# EAGLE board PCB v21 (EAGLE 9.7.0)
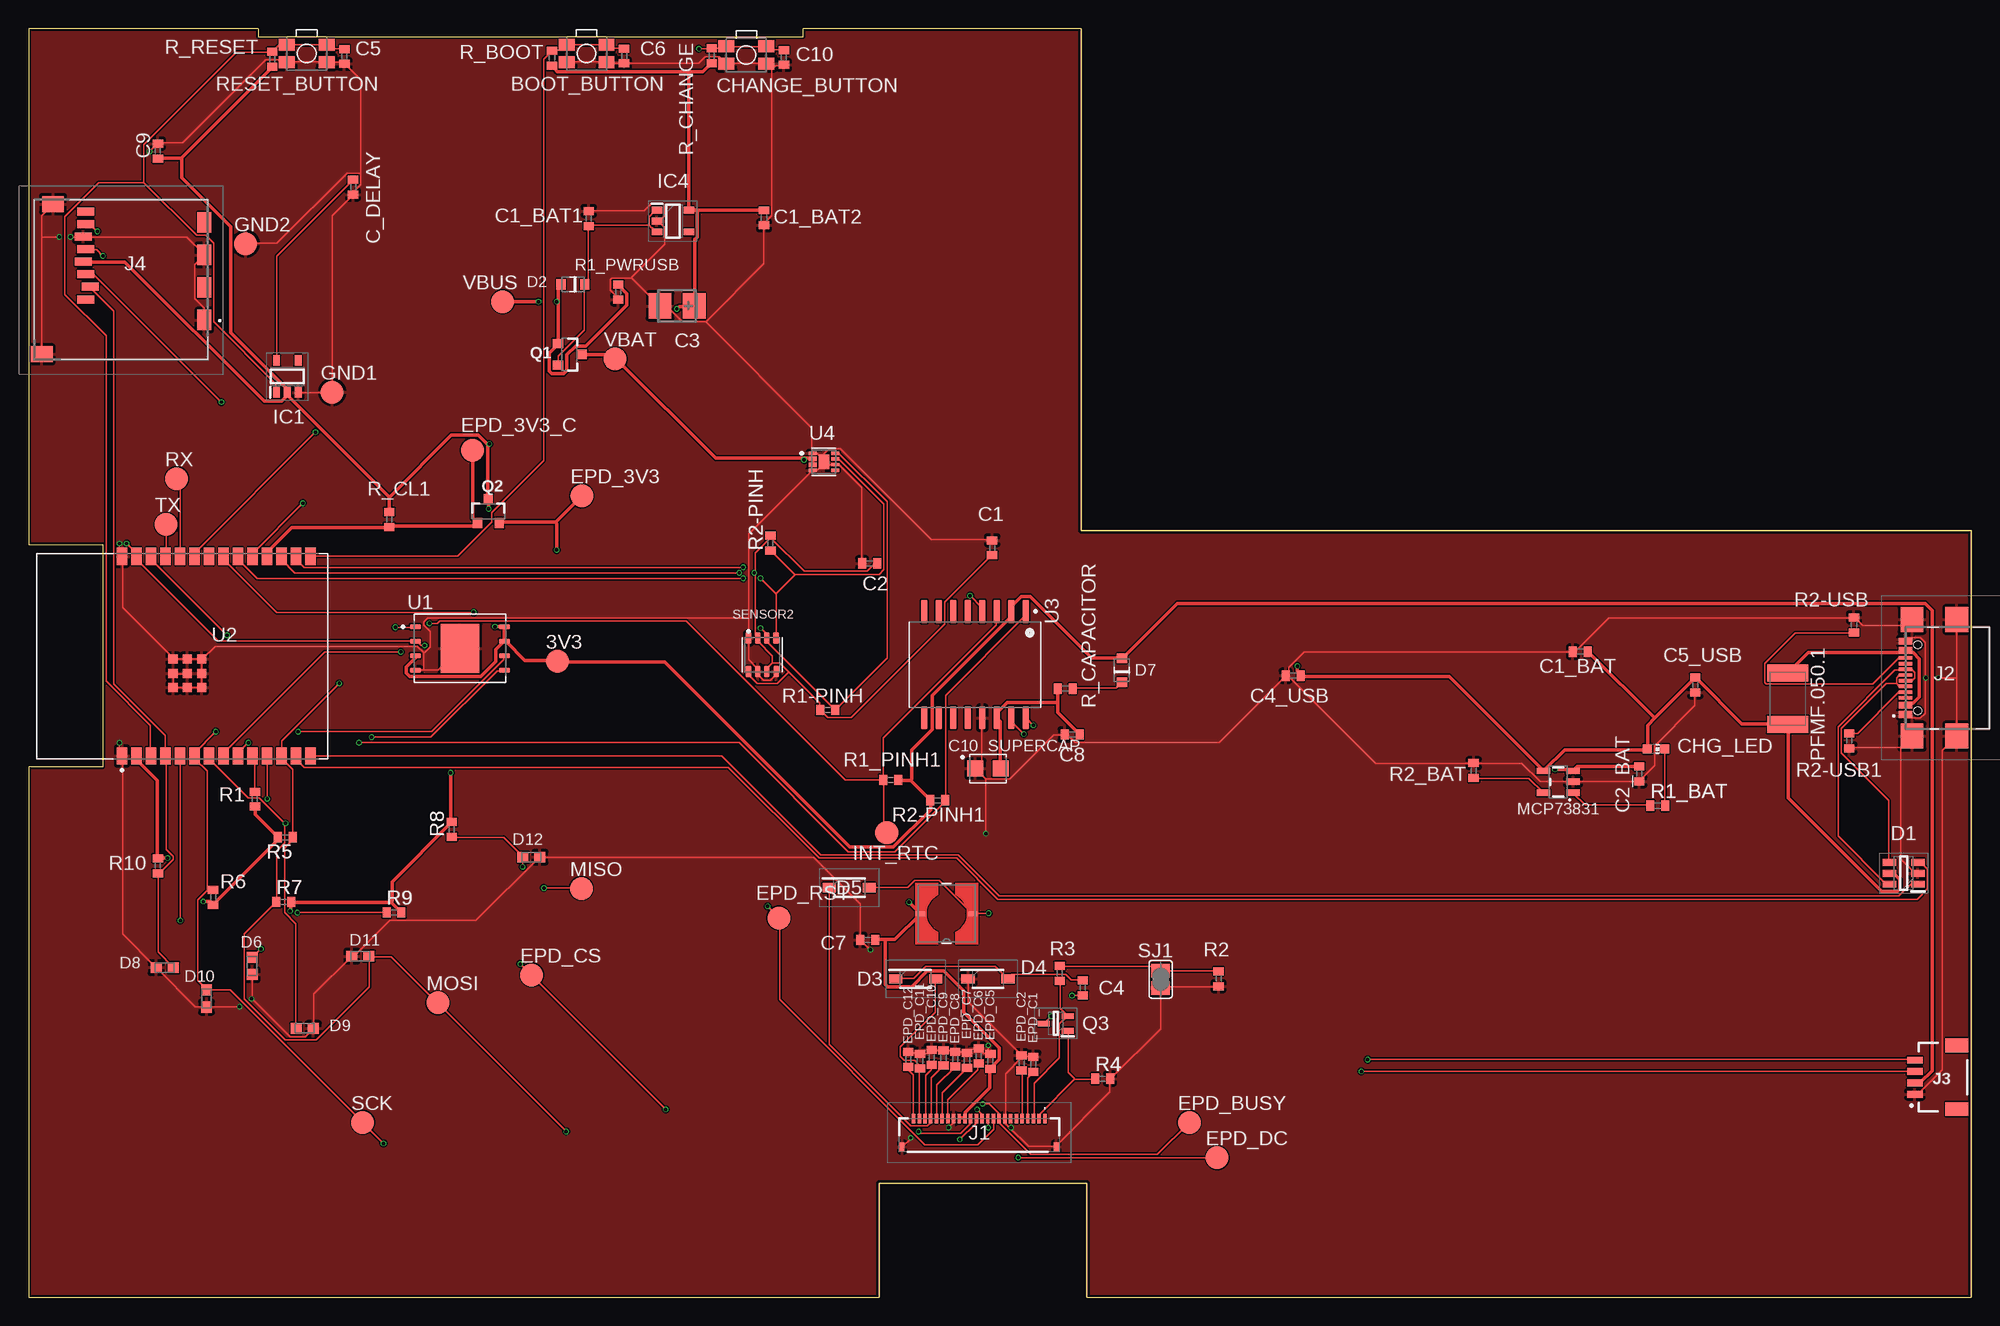
[diagram p0: board, top side]
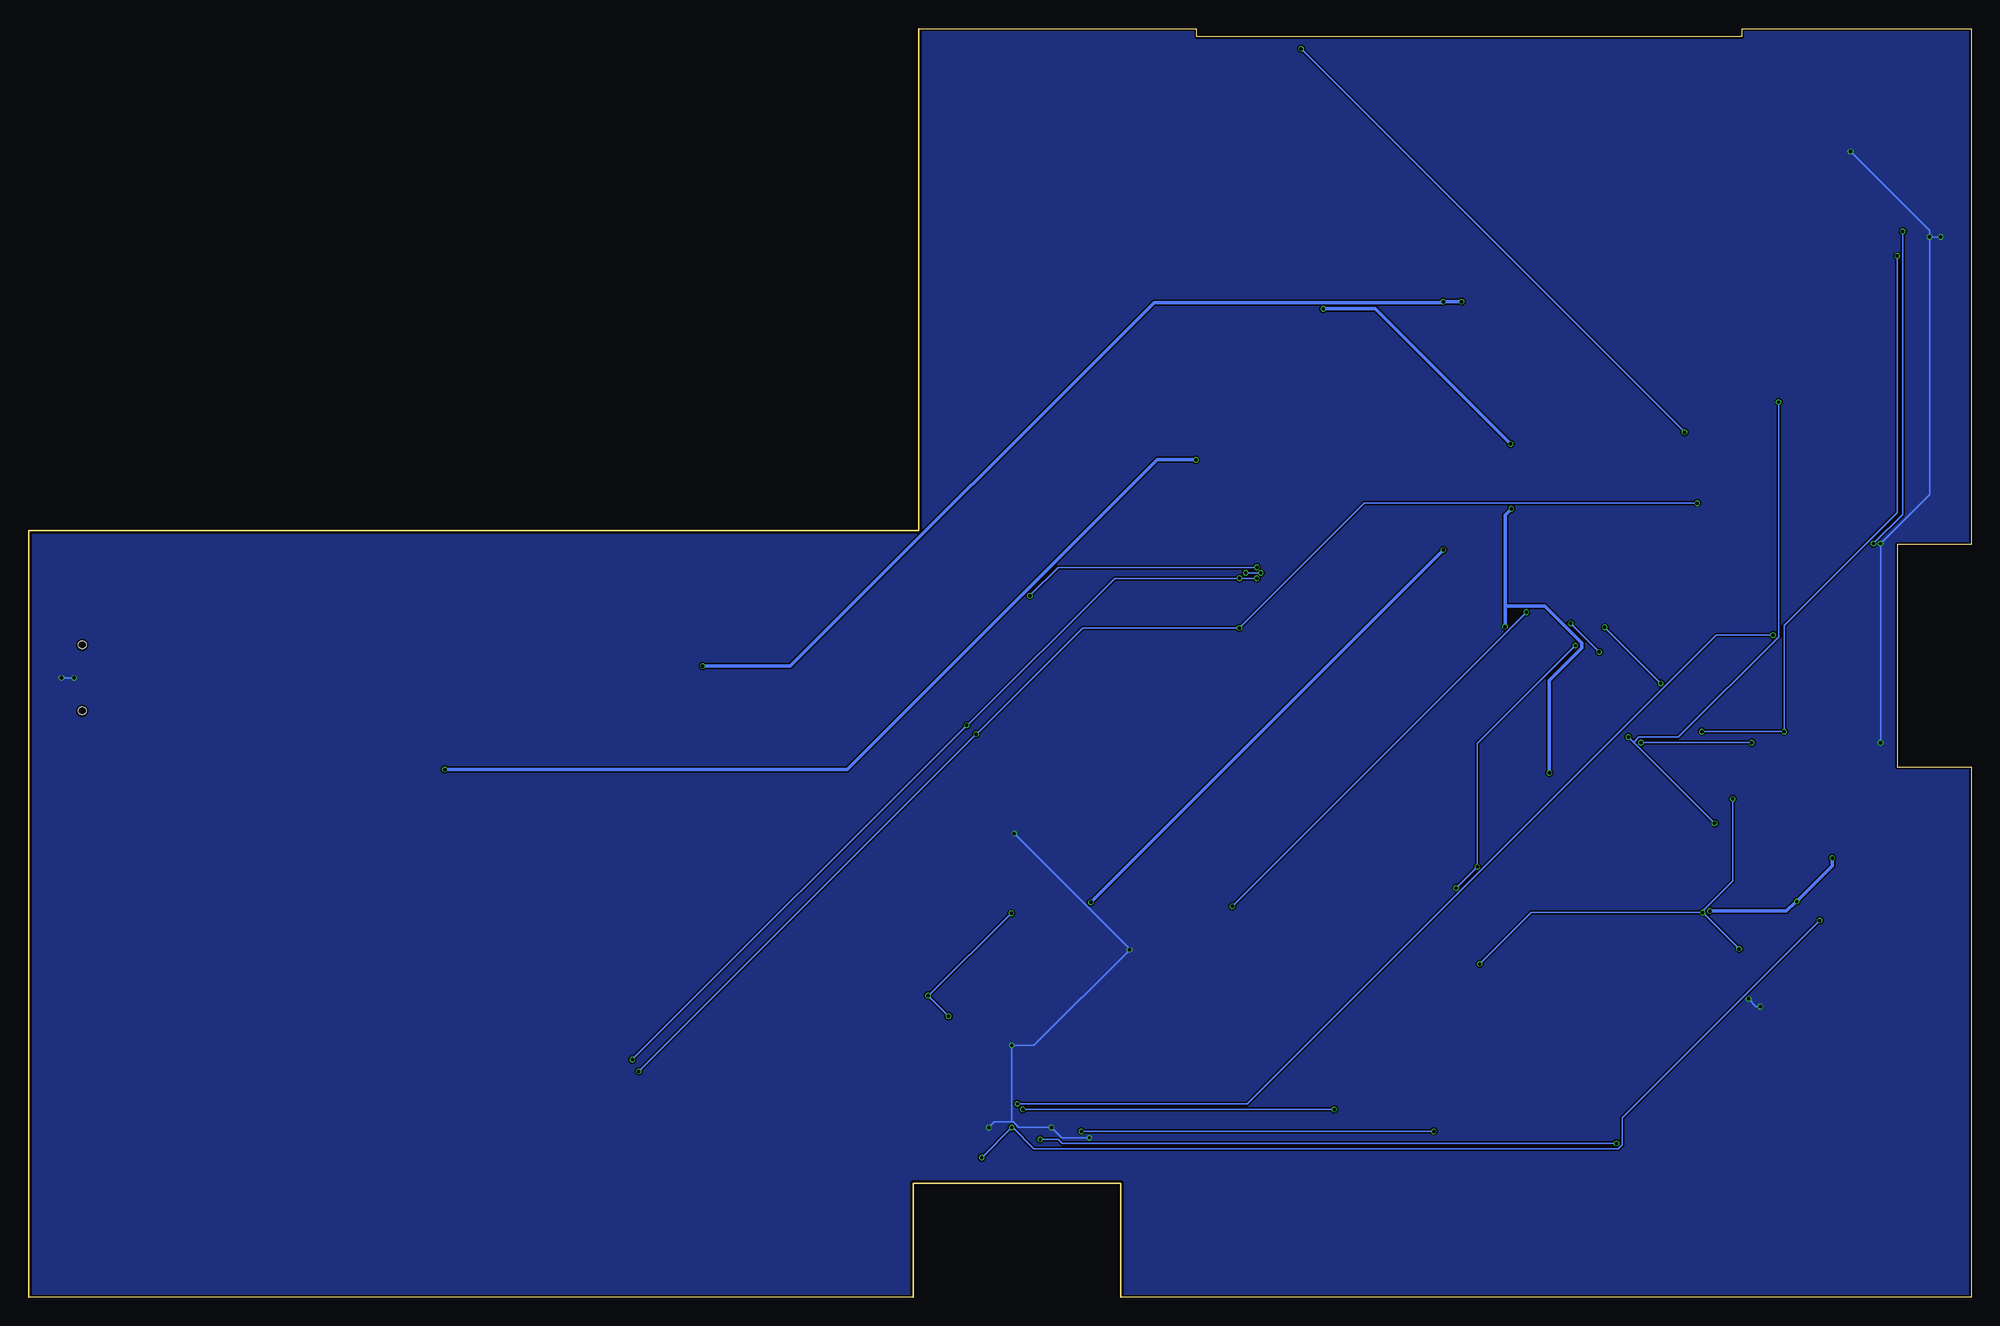
[diagram p1: board, bottom side, seen from below]

Size 170.2 x 111.2 mm. Coordinates in mm from the lower left corner, seen from the top.
Outline: 0,0 74.51,0 74.51,10 92.71,10 92.71,0 170.2,0 170.2,67.2 92.2,67.2 92.2,111.2 67.85,111.2 67.85,110.49 20.13,110.49 20.13,111.2 0,111.2 0,66 6.5,66 6.5,46.5 0,46.5 0,0
Copper layers (1*16): Top 0.035mm / dielectric 1.6mm / Bottom 0.035mm
Design rules "jlcpcb-2layers.dru": minimum track width 0.15mm, minimum drill 0.3mm, track to track 5mil, track to pad 5mil, pad to pad 5mil, via to via 5mil, smd to smd 5mil, copper to edge 0.2mm, drill to drill 6mil, minimum pad ring 10mil, minimum via ring 3mil, stop-mask expansion 4mil, vias tented up to drill 0mil, thermal gap 10mil
Net classes: 1 trasee putere: width 0.3 mm

## Footprints (pad centres in the part's own frame; a part is rotated, then mirrored left to right if it is on the bottom)
TP20R = smd 2 x 2: TP 0,0
MYBUTTON = smd 1.4 x 1.05: 1 1.75,0.75; 2 -1.75,0.75; 3 -1.75,-0.75; 4 1.75,-0.75
ESP32_WROVER_EAGLE-LTSPICE_C0402 = smd 0.7 x 0.9: 1 -0.65,0; 2 0.65,0
RCL_CT3528 = smd 2 x 2.2: + -1.5,0; - 1.5,0
CAPCP3225X100N = smd 1.4 x 1.4: 1 -1.1,0; 2 1.1,0
ADAFRUIT_CHIP-LED0603 = smd 0.8 x 0.8: A 0,-0.75; C 0,0.75
SOT95P280X145-6N = smd 1.2 x 0.6: 1 -1.25,0.95; 2 -1.25,0; 3 -1.25,-0.95; 4 1.25,-0.95; 5 1.25,0; 6 1.25,0.95
ESP32_WROVER_AVX---SD0805S020S1R0_AVX_SD0805S020S1R0_0 = smd 0.8 x 0.9: 1 -1.05,0; 2 1.05,0
SOD3716X135N = smd 1.15 x 0.8: 1 -1.75,0; 2 1.75,0
DIOC1608X36N = smd 0.97 x 0.94: 1 -0.75,0; 2 0.75,0
SOT95P280X120-5N = smd 0.9 x 0.6: 1 -1.4,0.95; 2 -1.4,0; 3 -1.4,-0.95; 4 1.4,-0.95; 5 1.4,0.95
FH34SRJ24S05SH99 = smd 0.3 x 0.8: 1 5.75,1.45; 2 5.25,1.45; 3 4.75,1.45; 4 4.25,1.45; 5 3.75,1.45; 6 3.25,1.45; 7 2.75,1.45; 8 2.25,1.45; 9 1.75,1.45; 10 1.25,1.45; 11 0.75,1.45; 12 0.25,1.45; 13 -0.25,1.45; 14 -0.75,1.45; 15 -1.25,1.45; 16 -1.75,1.45; 17 -2.25,1.45; 18 -2.75,1.45; 19 -3.25,1.45; 20 -3.75,1.45; 21 -4.25,1.45; 22 -4.75,1.45; 23 -5.25,1.45; 24 -5.75,1.45 | smd 0.4 x 0.8: MP1 6.75,-1.05; MP2 -6.75,-1.05
SAMACSYS_PARTS_USB4110GFA = smd 0.3 x 1.15: A1 -3.35,3.678; A4 -2.55,3.678; A5 -1.25,3.678; A6 -0.25,3.678; A7 0.25,3.678; A8 1.25,3.678; A9 2.55,3.678; A12 3.35,3.678; B1 3.05,3.678; B4 2.25,3.678; B5 1.75,3.678; B6 0.75,3.678; B7 -0.75,3.678; B8 -1.75,3.678; B9 -2.25,3.678; B12 -3.05,3.678 | smd 2.18 x 2: MP1 -5.11,-0.827; MP2 5.11,-0.827; MP3 -5.11,3.103; MP4 5.11,3.103 | hole 0.65: -2.89,2.603; 2.89,2.603
JST04_1MM_RA = smd 0.6 x 1.35: 1 -1.5,0; 2 -0.5,0; 3 0.5,0; 4 1.5,0 | smd 1.2 x 2: NC1 2.8,-3.675; NC2 -2.8,-3.675
112ATAARR03ATTEND = smd 1.8 x 1.2: G1 10.6,10.4; G2 4.9,10.4; S1 7.75,10.4; S2 2.05,10.4 | smd 1.4 x 1.9: G3 13.6,-3.85; G4 0.45,-2.85 | smd 0.7 x 1.5: P1 8.8,0; P2 7.7,0.4; P3 6.6,0; P4 5.5,-0.2; P5 4.4,0; P6 3.3,-0.2; P7 2.2,0; P8 1.1,0
IND_4828-WE-TPC_WRE = smd 0.813 x 0.406: 1 -2.286,0; 2 2.286,0
ESP32_WROVER_SPARKFUN-IC-POWER_SOT23-5 = smd 0.55 x 1.2: 1 -0.95,-1.3; 2 0,-1.3; 3 0.95,-1.3; 4 0.95,1.3; 5 -0.95,1.3
ESP32C6_VARISTOR_CT/CN1812 = smd 1.5 x 3.6: 1 -2.25,0; 2 2.25,0
ESP32_WROVER_SPARKFUN-DISCRETESEMI_SOT23-3 = smd 0.8 x 0.9: 1 -0.95,-1; 2 0.95,-1; 3 0,1.1
SOT65P210X110-3N = smd 1.05 x 0.5: 1 -1.05,0.65; 2 -1.05,-0.65; 3 1.05,0
ESP32_WROVER_EAGLE-LTSPICE_R0402 = smd 0.7 x 0.9: 1 -0.65,0; 2 0.65,0
ESP32_WROVER_BME680_PSON80P300X300X100-8N = smd 1.016 x 0.5: 1 1.458,1.2; 2 1.458,0.4; 3 1.458,-0.4; 4 1.458,-1.2; 5 -1.458,-1.22; 6 -1.458,-0.4; 7 -1.458,0.4; 8 -1.458,1.2
SJ = smd 1.168 x 1.6: 1 -0.762,0; 2 0.762,0
SON127P600X800X80-9N = smd 0.94 x 0.44: 1 -3.895,1.905; 2 -3.895,0.635; 3 -3.895,-0.635; 4 -3.895,-1.905; 5 3.895,-1.905; 6 3.895,-0.635; 7 3.895,0.635; 8 3.895,1.905 | smd 3.4 x 4.3: 9 0,0
XCVR_ESP32-C6-WROOM-1-N8 = smd 1.5 x 0.9: 1 -8.75,5.26; 2 -8.75,3.99; 3 -8.75,2.72; 4 -8.75,1.45; 5 -8.75,0.18; 6 -8.75,-1.09; 7 -8.75,-2.36; 8 -8.75,-3.63; 9 -8.75,-4.9; 10 -8.75,-6.17; 11 -8.75,-7.44; 12 -8.75,-8.71; 13 -8.75,-9.98; 14 -8.75,-11.25; 15 8.75,-11.25; 16 8.75,-9.98; 17 8.75,-8.71; 18 8.75,-7.44; 19 8.75,-6.17; 20 8.75,-4.9; 21 8.75,-3.63; 22 8.75,-2.36; 23 8.75,-1.09; 24 8.75,0.18; 25 8.75,1.45; 26 8.75,2.72; 27 8.75,3.99; 28 8.75,5.26 | smd 0.8 x 0.8: 29_1 -2.755,0.79; 29_2 -1.505,0.79; 29_3 -0.255,0.79; 29_4 -2.755,-0.46; 29_5 -1.505,-0.46; 29_6 -0.255,-0.46; 29_7 -2.755,-1.71; 29_8 -1.505,-1.71; 29_9 -0.255,-1.71
SOIC127P1032X265-16N = smd 2.05 x 0.59: 1 -4.655,4.445; 2 -4.655,3.175; 3 -4.655,1.905; 4 -4.655,0.635; 5 -4.655,-0.635; 6 -4.655,-1.905; 7 -4.655,-3.175; 8 -4.655,-4.445; 9 4.655,-4.445; 10 4.655,-3.175; 11 4.655,-1.905; 12 4.655,-0.635; 13 4.655,0.635; 14 4.655,1.905; 15 4.655,3.175; 16 4.655,4.445
SON50P200X200X80-9N = smd 0.76 x 0.27: 1 -0.985,0.75; 4 -0.985,-0.75; 5 0.985,-0.75; 6 0.985,-0.25; 7 0.985,0.25; 8 0.985,0.75 | smd 0.813 x 0.406: 2 -0.985,0.25; 3 -0.985,-0.25 | smd 0.9 x 1.3: 9 0,0

## Placement (x,y rotation side)
3V3  TPTP20R  [TP20R]  46.33,55.75 0 top
BOOT_BUTTON  BUTTON_CUSYOMV1  [MYBUTTON]  48.88,109.02 180 top
C1  100nF  [ESP32_WROVER_EAGLE-LTSPICE_C0402]  84.41,65.7 90 top
C1_BAT  4.7uF  [ESP32_WROVER_EAGLE-LTSPICE_C0402]  135.94,56.59 180 top
C1_BAT1  4.7uF  [ESP32_WROVER_EAGLE-LTSPICE_C0402]  49.07,94.55 90 top
C1_BAT2  4.7uF  [ESP32_WROVER_EAGLE-LTSPICE_C0402]  64.43,94.61 270 top
C2  100nF  [ESP32_WROVER_EAGLE-LTSPICE_C0402]  73.68,64.33 180 top
C2_BAT  4.7uF  [ESP32_WROVER_EAGLE-LTSPICE_C0402]  141.09,45.89 270 top
C3  100uF  [RCL_CT3528]  56.81,86.89 180 top
C4  4.7uF/25V  [ESP32_WROVER_EAGLE-LTSPICE_C0402]  92.35,27.14 270 top
C4_USB  100nF  [ESP32_WROVER_EAGLE-LTSPICE_C0402]  110.78,54.49 180 top
C5  1uF  [ESP32_WROVER_EAGLE-LTSPICE_C0402]  27.67,108.75 270 top
C5_USB  4.7uF  [ESP32_WROVER_EAGLE-LTSPICE_C0402]  146.01,53.67 270 top
C6  100nF  [ESP32_WROVER_EAGLE-LTSPICE_C0402]  52.17,108.8 270 top
C7  10uF  [ESP32_WROVER_EAGLE-LTSPICE_C0402]  73.51,31.33 180 top
C8  100nF  [ESP32_WROVER_EAGLE-LTSPICE_C0402]  91.42,49.33 180 top
C9  100nF  [ESP32_WROVER_EAGLE-LTSPICE_C0402]  11.33,100.46 90 top
C10  100nF  [ESP32_WROVER_EAGLE-LTSPICE_C0402]  66.17,108.66 270 top
C10_SUPERCAP  CPH3225A  [CAPCP3225X100N]  84.05,46.35 0 top
C_DELAY  100nF  [ESP32_WROVER_EAGLE-LTSPICE_C0402]  28.43,97.31 270 top
CHANGE_BUTTON  BUTTON_CUSYOMV1  [MYBUTTON]  62.89,108.89 180 top
CHG_LED  [ADAFRUIT_CHIP-LED0603]  142.56,48.06 270 top
D1  USBLC6-2SC6Y  [SOT95P280X145-6N]  164.26,37.17 180 top
D2  ESP32_WROVER_AVX---SD0805S020S1R0_AVX_SD0805S020S1R0_0_0AVX_SD0805S020S1R0_0_0  [ESP32_WROVER_AVX---SD0805S020S1R0_AVX_SD0805S020S1R0_0]  47.69,88.78 180 top
D3  MBR0530  [SOD3716X135N]  77.71,27.91 0 top
D4  MBR0530  [SOD3716X135N]  84.05,27.91 0 top
D5  MBR0530  [SOD3716X135N]  71.89,35.91 0 top
D6  PGB1010603MR  [DIOC1608X36N]  19.59,29.05 90 top
D7  SD0805S020S1R0  [ESP32_WROVER_AVX---SD0805S020S1R0_AVX_SD0805S020S1R0_0]  95.78,54.96 90 top
D8  PGB1010603MR  [DIOC1608X36N]  11.93,28.91 0 top
D9  PGB1010603MR  [DIOC1608X36N]  24.19,23.59 180 top
D10  PGB1010603MR  [DIOC1608X36N]  15.59,26.19 90 top
D11  PGB1010603MR  [DIOC1608X36N]  29.07,29.91 0 top
D12  PGB1010603MR  [DIOC1608X36N]  44.05,38.59 180 top
EPD_3V3  TPTP20R  [TP20R]  48.48,70.25 0 top
EPD_3V3_C  TPTP20R  [TP20R]  38.88,74.25 0 top
EPD_BUSY  TPTP20R  [TP20R]  101.69,15.33 0 top
EPD_C1  1uF/50V  [ESP32_WROVER_EAGLE-LTSPICE_C0402]  88.02,20.44 90 top
EPD_C2  1uF/50V  [ESP32_WROVER_EAGLE-LTSPICE_C0402]  86.99,20.55 90 top
EPD_C5  0.1uF/50V  [ESP32_WROVER_EAGLE-LTSPICE_C0402]  84.26,20.7 90 top
EPD_C6  1uF/50V  [ESP32_WROVER_EAGLE-LTSPICE_C0402]  83.23,21.16 90 top
EPD_C7  1uF/50V  [ESP32_WROVER_EAGLE-LTSPICE_C0402]  82.2,20.78 90 top
EPD_C8  1uF/50V  [ESP32_WROVER_EAGLE-LTSPICE_C0402]  81.18,20.89 90 top
EPD_C9  1uF/50V  [ESP32_WROVER_EAGLE-LTSPICE_C0402]  80.15,21 90 top
EPD_C10  1uF/50V  [ESP32_WROVER_EAGLE-LTSPICE_C0402]  79.12,21.03 90 top
EPD_C11  1uF/50V  [ESP32_WROVER_EAGLE-LTSPICE_C0402]  78.1,20.71 90 top
EPD_C12  1uF/50V  [ESP32_WROVER_EAGLE-LTSPICE_C0402]  77.07,20.87 90 top
EPD_CS  TPTP20R  [TP20R]  44.08,28.25 0 top
EPD_DC  TPTP20R  [TP20R]  104.13,12.25 0 top
EPD_RST  TPTP20R  [TP20R]  65.73,33.25 0 top
GND1  TPTP20R  [TP20R]  26.59,79.33 0 top
GND2  TPTP20R  [TP20R]  19.01,92.33 0 top
IC1  BD5229G-TR  [SOT95P280X120-5N]  22.67,80.71 90 top
IC4  XC6220A331MR-G  [SOT95P280X120-5N]  56.45,94.33 0 top
INT_RTC  TPTP20R  [TP20R]  75.18,40.75 0 top
J1  FH34SRJ-24S-0.5SH_99_  [FH34SRJ24S05SH99]  83.28,14.23 0 top
J2  SAMACSYS_PARTS_USB4110-GF-A  [SAMACSYS_PARTS_USB4110GFA]  168.1,54.3 90 top
J3  QWIIC_RIGHT_ANGLE  [JST04_1MM_RA]  165.25,19.3 90 top
J4  112A-TAAR-R03_ATTEND  [112ATAARR03ATTEND]  5,96.26 270 top
L1  68uH  [IND_4828-WE-TPC_WRE]  80.43,33.64 180 top
MCP73831  ESP32_WROVER_SPARKFUN-IC-POWER_MCP73831  [ESP32_WROVER_SPARKFUN-IC-POWER_SOT23-5]  134,45.19 90 top
MISO  TPTP20R  [TP20R]  48.43,35.83 0 top
MOSI  TPTP20R  [TP20R]  35.85,25.83 0 top
PFMF.050.1  ESP32C6_VARISTORCN1812  [ESP32C6_VARISTOR_CT/CN1812]  154.11,52.46 270 top
Q1  20V/4.2A/52mΩ/1.4W  [ESP32_WROVER_SPARKFUN-DISCRETESEMI_SOT23-3]  47.37,82.64 270 top
Q2  20V/4.2A/52mΩ/1.4W  [ESP32_WROVER_SPARKFUN-DISCRETESEMI_SOT23-3]  40.28,68.87 0 top
Q3  SI1308EDL-T1-GE3  [SOT65P210X110-3N]  89.99,24.01 180 top
R1  10k  [ESP32_WROVER_EAGLE-LTSPICE_R0402]  19.83,43.67 90 top
R1-PINH  10k  [ESP32_WROVER_EAGLE-LTSPICE_R0402]  70,51.49 180 top
R1_BAT  200  [ESP32_WROVER_EAGLE-LTSPICE_R0402]  142.72,43.09 0 top
R1_PINH1  10k  [ESP32_WROVER_EAGLE-LTSPICE_R0402]  75.52,45.35 0 top
R1_PWRUSB  100k  [ESP32_WROVER_EAGLE-LTSPICE_R0402]  51.65,88.11 90 top
R2  2.2  [ESP32_WROVER_EAGLE-LTSPICE_R0402]  104.25,27.93 90 top
R2-PINH  10k  [ESP32_WROVER_EAGLE-LTSPICE_R0402]  64.99,66.11 90 top
R2-PINH1  10k  [ESP32_WROVER_EAGLE-LTSPICE_R0402]  79.65,43.57 180 top
R2-USB  5k1  [ESP32_WROVER_EAGLE-LTSPICE_R0402]  159.91,58.94 90 top
R2-USB1  5k1  [ESP32_WROVER_EAGLE-LTSPICE_R0402]  159.49,48.78 90 top
R2_BAT  2K  [ESP32_WROVER_EAGLE-LTSPICE_R0402]  126.59,46.17 270 top
R3  0.47  [ESP32_WROVER_EAGLE-LTSPICE_R0402]  90.33,28.41 90 top
R4  10k  [ESP32_WROVER_EAGLE-LTSPICE_R0402]  94.09,19.17 0 top
R5  10k  [ESP32_WROVER_EAGLE-LTSPICE_R0402]  22.49,40.33 180 top
R6  10k  [ESP32_WROVER_EAGLE-LTSPICE_R0402]  16.17,35.07 270 top
R7  10k  [ESP32_WROVER_EAGLE-LTSPICE_R0402]  22.35,34.67 0 top
R8  10k  [ESP32_WROVER_EAGLE-LTSPICE_R0402]  37.07,41.02 90 top
R9  10k  [ESP32_WROVER_EAGLE-LTSPICE_R0402]  32.01,33.75 0 top
R10  10k  [ESP32_WROVER_EAGLE-LTSPICE_R0402]  11.33,37.83 90 top
R_BOOT  10k  [ESP32_WROVER_EAGLE-LTSPICE_R0402]  45.85,108.61 270 top
R_CAPACITOR  15  [ESP32_WROVER_EAGLE-LTSPICE_R0402]  90.81,53.35 0 top
R_CHANGE  10k  [ESP32_WROVER_EAGLE-LTSPICE_R0402]  59.85,108.82 270 top
R_CL1  10k  [ESP32_WROVER_EAGLE-LTSPICE_R0402]  31.59,68.18 270 top
R_RESET  10k  [ESP32_WROVER_EAGLE-LTSPICE_R0402]  21.34,108.51 90 top
RESET_BUTTON  BUTTON_CUSYOMV1  [MYBUTTON]  24.37,109.02 180 top
RX  TPTP20R  [TP20R]  12.97,71.75 0 top
SCK  TPTP20R  [TP20R]  29.27,15.33 0 top
SENSOR2  BME688  [ESP32_WROVER_BME680_PSON80P300X300X100-8N]  64.27,56.32 90 top
SJ1  [SJ]  99.17,27.88 90 top
TX  TPTP20R  [TP20R]  12.05,67.75 0 top
U1  W25Q512JVEIQ  [SON127P600X800X80-9N]  37.79,56.87 0 top
U2  ESP32-C6-WROOM-1-N8  [XCVR_ESP32-C6-WROOM-1-N8]  13.45,56.2 90 top
U3  DS3231SN#  [SOIC127P1032X265-16N]  82.91,55.45 270 top
U4  MAX17048G+T10  [SON50P200X200X80-9N]  69.68,73.23 0 top
VBAT  TPTP20R  [TP20R]  51.39,82.25 0 top
VBUS  TPTP20R  [TP20R]  41.53,87.25 0 top

## Library data of the parts
3V3 BOOT_BUTTON CHANGE_BUTTON CHG_LED EPD_3V3 EPD_3V3_C EPD_BUSY EPD_CS EPD_DC EPD_RST GND1 GND2 INT_RTC MISO MOSI PFMF.050.1 RESET_BUTTON RX SCK SJ1 TX VBAT VBUS = DeskAssistant v19 v1
C1 C1_BAT C1_BAT1 C1_BAT2 C2 C2_BAT C4 C4_USB C5 C5_USB C6-C10 C_DELAY EPD_C1 EPD_C2 EPD_C5-EPD_C12 = DeskAssistant v19 v1; SPICEMODEL: NONE; SPICEPREFIX: C
C3 = DeskAssistant v19 v1; SPICEPREFIX: C
C10_SUPERCAP = DeskAssistant v19 v1; AVAILABILITY: Not in stock; CHECK_PRICES: https://www.snapeda.com/parts/CPH3225A/Seiko+Instruments/view-part/?ref=eda; DESCRIPTION: 11 mF (EDLC) Supercapacitor 3.3 V 1210 (3225 Metric) - -; MF: Seiko Instruments; MP: CPH3225A; PACKAGE: 1210 Seiko; PRICE: None; PURCHASE-URL: https://www.snapeda.com/api/url_track_click_mouser/?unipart_id=562593&manufacturer=Seiko Instruments&part_name=CPH3225A&search_term=None; SNAPEDA_LINK: https://www.snapeda.com/parts/CPH3225A/Seiko+Instruments/view-part/?ref=snap
D1 = DeskAssistant v19 v1; AVAILABILITY: In Stock; CHECK_PRICES: https://www.snapeda.com/parts/USBLC6-2SC6Y/STMicroelectronics/view-part/?ref=eda; DESCRIPTION: 17V Clamp 5A (8/20µs) Ipp Tvs Diode Surface Mount SOT-23-6; MF: STMicroelectronics; MP: USBLC6-2SC6Y; PACKAGE: SOT-23-6 STMicroelectronics; PRICE: None; SNAPEDA_LINK: https://www.snapeda.com/parts/USBLC6-2SC6Y/STMicroelectronics/view-part/?ref=snap
D2 D7 = DeskAssistant v19 v1; CENTROID_NOT_SPECIFIED: No; DATASHEET: http://datasheets.avx.com/schottky.pdf; DIGIKEY_DESCRIPTION: DIODE SCHOTTKY 20V 1A 0805; DIGIKEY_PART_NUMBER: 478-7800-1-ND; LEAD_FREE: yes; MF: AVX; MOUSER_PART_NUMBER: 581-SD0805S020S1R0; PACKAGE: 0805 (2012 metric); PREFIX: D; ROHS: yes; TEMPERATURE_RANGE_HIGH: +125°C; TEMPERATURE_RANGE_LOW: -55°C
D3-D5 = DeskAssistant v19 v1; AVAILABILITY: In Stock; CHECK_PRICES: https://www.snapeda.com/parts/MBR0530/Onsemi/view-part/?ref=eda; DESCRIPTION: Diode Schottky 30 V 500mA Surface Mount SOD-123; MF: ON Semiconductor; MP: MBR0530; PACKAGE: SOD-123-2 ON Semiconductor; PRICE: None; PURCHASE-URL: https://www.snapeda.com/api/url_track_click_mouser/?unipart_id=179458&manufacturer=ON Semiconductor&part_name=MBR0530&search_term=None; SNAPEDA_LINK: https://www.snapeda.com/parts/MBR0530/Onsemi/view-part/?ref=snap
D6 D8-D12 = DeskAssistant v19 v1; AVAILABILITY: In Stock; CHECK_PRICES: https://www.snapeda.com/parts/PGB1010603MR/Littelfuse/view-part/?ref=eda; DESCRIPTION: 150V (Typ) Clamp - Ipp Tvs Diode Surface Mount 0603 (1608 Metric); MF: Littelfuse Inc.; MP: PGB1010603MR; PACKAGE: 0603 Littelfuse Inc.; PRICE: None; PURCHASE-URL: https://www.snapeda.com/api/url_track_click_mouser/?unipart_id=5659453&manufacturer=Littelfuse Inc.&part_name=PGB1010603MR&search_term=None; SNAPEDA_LINK: https://www.snapeda.com/parts/PGB1010603MR/Littelfuse/view-part/?ref=snap
IC1 = DeskAssistant v19 v1; DESCRIPTION: Voltage Detector with Adjustable Delay Time: CMOS processes are utilized to develop high precision, low current consumption CMOS reset ICs that allow arbitrary setting of the delay time. The extensive lineup includes both Nch Open Drain and CMOS output types in a wide range of detection voltages (from 2.3V to 6.0V, in 0.1V steps), enabling selection of the ideal solution based on customer requirements. In addition, the entire series is of course both lead-free and RoHS-compliant.; HEIGHT: 1.25mm; MANUFACTURER_NAME: ROHM Semiconductor; MANUFACTURER_PART_NUMBER: BD5229G-TR; MOUSER_PART_NUMBER: 755-BD5229G-TR; MOUSER_PRICE-STOCK: https://www.mouser.co.uk/ProductDetail/ROHM-Semiconductor/BD5229G-TR?qs=4kLU8WoGk0vvnhrrYwdszw%3D%3D
IC4 = DeskAssistant v19 v1; DESCRIPTION: LDO Voltage Regulators; HEIGHT: 1.2mm; MANUFACTURER_NAME: Torex; MANUFACTURER_PART_NUMBER: XC6220A331MR-G; MOUSER_PART_NUMBER: 865-XC6220A331MR-G; MOUSER_PRICE-STOCK: https://www.mouser.co.uk/ProductDetail/Torex-Semiconductor/XC6220A331MR-G?qs=AsjdqWjXhJ8ZSWznL1J0gg%3D%3D
J1 = DeskAssistant v19 v1; DESCRIPTION: 24 Position FFC, FPC Connector Contacts, Top and Bottom 0.020" (0.50mm) Surface Mount, Right Angle; HEIGHT: 1.1mm; MANUFACTURER_NAME: Hirose; MANUFACTURER_PART_NUMBER: FH34SRJ-24S-0.5SH(99); MOUSER_PART_NUMBER: 798-FH34SRJ24S05SH99; MOUSER_PRICE-STOCK: https://www.mouser.co.uk/ProductDetail/Hirose-Connector/FH34SRJ-24S-0.5SH99?qs=vcbW%252B4%252BSTIpKBl5ap9J8Fw%3D%3D
J2 = DeskAssistant v19 v1; DESCRIPTION: CONN USB 2.0 TYPE-C R/A SMT; HEIGHT: 3.26mm; MANUFACTURER_NAME: GCT (GLOBAL CONNECTOR TECHNOLOGY); MANUFACTURER_PART_NUMBER: USB4110-GF-A; MOUSER_PART_NUMBER: 640-USB4110-GF-A; MOUSER_PRICE-STOCK: https://www.mouser.co.uk/ProductDetail/GCT/USB4110-GF-A?qs=KUoIvG%2F9IlYiZvIXQjyJeA%3D%3D
J3 = DeskAssistant v19 v1; PROD_ID: CONN-13694
J4 = DeskAssistant v19 v1; DESCRIPTION: Micro SD Card Socket, Push-Push Type, Top Mount, SMT, H=1.83mm, 10u; HEIGHT: 1.9mm; MANUFACTURER_NAME: ATTEND; MANUFACTURER_PART_NUMBER: 112A-TAAR-R03 ATTEND
L1 = DeskAssistant v19 v1; COPYRIGHT: Copyright (C) 2024 Ultra Librarian. All rights reserved.; MANUFACTURER_PART_NUMBER: 744043680; MFR_NAME: Wurth Electronics
MCP73831 = DeskAssistant v19 v1; PROD_ID: IC-09995
Q1 Q2 = DeskAssistant v19 v1; PROD_ID: TRAN-14388
Q3 = DeskAssistant v19 v1; AVAILABILITY: In Stock; CHECK_PRICES: https://www.snapeda.com/parts/SI1308EDL-T1-GE3/Vishay+Siliconix/view-part/?ref=eda; DESCRIPTION: Si1308EDL-T1-GE3 N-channel MOSFET Transistor, 1.5 A, 30 V, 3-Pin SC-70 | Siliconix / Vishay SI1308EDL-T1-GE3; MF: Vishay Siliconix; MP: SI1308EDL-T1-GE3; PACKAGE: SOT-323 Vishay Semiconductor; PRICE: None; PURCHASE-URL: https://www.snapeda.com/api/url_track_click_mouser/?unipart_id=274603&manufacturer=Vishay Siliconix&part_name=SI1308EDL-T1-GE3&search_term=None; SNAPEDA_LINK: https://www.snapeda.com/parts/SI1308EDL-T1-GE3/Vishay+Siliconix/view-part/?ref=snap
R1 R1-PINH R1_BAT R1_PINH1 R1_PWRUSB R2 R2-PINH R2-PINH1 R2-USB R2-USB1 R2_BAT R3-R10 R_BOOT R_CAPACITOR R_CHANGE R_CL1 R_RESET = DeskAssistant v19 v1; SPICEMODEL: NONE; SPICEPREFIX: R
SENSOR2 = DeskAssistant v19 v1; AVAILABILITY: Unavailable; DESCRIPTION: Integrated Environmental Unit; MF: Bosch Sensortec; MP: BME680; PACKAGE: LGA-8 Bosch Tools; PRICE: None
U1 = DeskAssistant v19 v1; AVAILABILITY: In Stock; CHECK_PRICES: https://www.snapeda.com/parts/W25Q512JVEIQ/Winbond+Electronics/view-part/?ref=eda; DESCRIPTION: FLASH - NOR Memory IC 512Mb (64M x 8) SPI - Quad I/O 133 MHz 8-WSON (8x6); MF: Winbond Electronics; MP: W25Q512JVEIQ; PACKAGE: Package; PRICE: None; SNAPEDA_LINK: https://www.snapeda.com/parts/W25Q512JVEIQ/Winbond+Electronics/view-part/?ref=snap
U2 = DeskAssistant v19 v1; AVAILABILITY: In Stock; CHECK_PRICES: https://www.snapeda.com/parts/ESP32-C6-WROOM-1-N8/Espressif+Systems/view-part/?ref=eda; DESCRIPTION: Multiprotocol Modules ESP32-C6 module, Wi-Fi 6 in 2.4 GHz band, Bluetooth 5, Zigbee 3.0 and Thread. ESP34-WROOM Compatible - ENGINEERING SAMPLE; MF: Espressif Systems; MP: ESP32-C6-WROOM-1-N8; PACKAGE: None; PRICE: None; SNAPEDA_LINK: https://www.snapeda.com/parts/ESP32-C6-WROOM-1-N8/Espressif+Systems/view-part/?ref=snap
U3 = DeskAssistant v19 v1; AVAILABILITY: In Stock; CHECK_PRICES: https://www.snapeda.com/parts/DS3231SN%23/Analog+Devices/view-part/?ref=eda; DESCRIPTION: Extremely Accurate I²C-Integrated RTC/TCXO/Crystal; MF: Analog Devices; MP: DS3231SN#; PACKAGE: SOIC-16 Maxim; PRICE: None; PURCHASE-URL: https://www.snapeda.com/api/url_track_click_mouser/?unipart_id=99048&manufacturer=Analog Devices&part_name=DS3231SN#&search_term=None; SNAPEDA_LINK: https://www.snapeda.com/parts/DS3231SN%23/Analog+Devices/view-part/?ref=snap
U4 = DeskAssistant v19 v1; AVAILABILITY: In Stock; CHECK_PRICES: https://www.snapeda.com/parts/MAX17048G+T10/Analog+Devices/view-part/?ref=eda; DESCRIPTION: 3µA 1-Cell/2-Cell Fuel Gauge with ModelGauge; MF: Analog Devices; MP: MAX17048G+T10; PACKAGE: TDFN-8 Maxim; PRICE: None; PURCHASE-URL: https://www.snapeda.com/api/url_track_click_mouser/?unipart_id=329239&manufacturer=Analog Devices&part_name=MAX17048G+T10&search_term=None; SNAPEDA_LINK: https://www.snapeda.com/parts/MAX17048G+T10/Analog+Devices/view-part/?ref=snap

## Nets
3V3 [trasee putere]: 3V3.TP C1_BAT2.1 C3.+ C9.1 D7.2 IC1.2 IC4.5 J3.2 J4.P4 Q2.3 R1.1 R1_PINH1.2 R2-PINH1.2 R5.2 R6.2 R7.2 R8.2 R9.2 R10.2 R_BOOT.2 R_CHANGE.2 R_CL1.1 R_RESET.1 U1.3 U1.7 U1.8 U2.2 U3.2
32KHZ: R2-PINH1.1 U2.9 U3.1
DN: D1.4 J2.A7 J2.B7
DP: D1.6 J2.A6 J2.B6
EPD_3V3 [trasee putere]: C7.1 EPD_3V3.TP EPD_C5.1 J1.15 J1.16 L1.2 Q2.2
EPD_3V3_C [trasee putere]: EPD_3V3_C.TP Q2.1 R_CL1.2 U2.18
EPD_BUSY: EPD_BUSY.TP J1.9 U2.26
EPD_CS: D6.2 EPD_CS.TP J1.12 R9.1 U2.11
EPD_DC: EPD_DC.TP J1.11 U2.5
EPD_RST: EPD_RST.TP J1.10 U2.21
FLASH_CS: D9.2 R5.1 U1.1 U2.12
GDR: J1.2 Q3.1 R4.1
GND: BOOT_BUTTON.1 BOOT_BUTTON.2 C1.2 C1_BAT1.2 C1_BAT2.2 C1_BAT.2 C2.2 C2_BAT.2 C3.- C4_USB.2 C5.2 C5_USB.2 C6.2 C7.2 C8.2 C9.2 C10.2 C10_SUPERCAP.1 C_DELAY.2 CHANGE_BUTTON.1 CHANGE_BUTTON.2 D1.2 D4.1 D6.1 D8.1 D9.1 D10.1 D11.1 D12.1 EPD_C1.2 EPD_C2.2 EPD_C5.2 EPD_C6.2 EPD_C7.2 EPD_C8.2 EPD_C9.2 EPD_C10.2 EPD_C11.2 EPD_C12.2 GND1.TP GND2.TP IC1.3 IC4.2 J1.8 J1.17 J1.MP1 J1.MP2 J2.A1 J2.A12 J2.B1 J2.B12 J2.MP1 J2.MP2 J2.MP3 J2.MP4 J3.1 J4.G1 J4.G2 J4.G3 J4.G4 J4.P6 MCP73831.2 R1_PWRUSB.1 R2-USB1.1 R2-USB.2 R2.1 R2_BAT.1 R4.2 RESET_BUTTON.1 RESET_BUTTON.2 SENSOR2.1 SENSOR2.5 SENSOR2.7 SJ1.1 U1.4 U1.9 U2.1 U2.28 U2.29_1 U2.29_2 U2.29_3 U2.29_4 U2.29_5 U2.29_6 U2.29_7 U2.29_8 U2.29_9 U3.13 U4.1 U4.4 U4.6 U4.9
GPIO8: R1.2 U2.10
I2C_PW: C1.1 C2.1 R1-PINH.2 R2-PINH.2 SENSOR2.2 SENSOR2.6 SENSOR2.8 U2.17
INT_RTC: INT_RTC.TP R1_PINH1.1 U2.8 U3.3
IO/BOOT: BOOT_BUTTON.3 BOOT_BUTTON.4 C6.1 R_BOOT.1 U2.15
IO/CHANGE: C10.1 CHANGE_BUTTON.3 CHANGE_BUTTON.4 R_CHANGE.1 U2.23
MISO: D12.2 J4.P7 MISO.TP R8.1 U1.2 U2.27
MOSI: D11.2 J1.14 J4.P3 MOSI.TP R7.1 U1.5 U2.7
N$1: J2.A5 R2-USB1.2
N$2: J2.B5 R2-USB.1
N$3: C1_BAT1.1 D2.1 IC4.1 IC4.3 Q1.2
N$4: C4.1 D3.1 D4.2
N$5: CHG_LED.C R1_BAT.2
N$6: MCP73831.1 R1_BAT.1
N$7: EPD_C6.1 J1.18
N$8: MCP73831.5 R2_BAT.2
N$9: EPD_C1.1 J1.4
N$10: EPD_C2.1 J1.5
N$11: EPD_C7.1 J1.19
N$12: EPD_C8.1 J1.20
N$13: D7.1 R_CAPACITOR.2
N$14: EPD_C10.1 J1.22
N$15: C_DELAY.1 IC1.5
N$16: EPD_C12.1 J1.24
PREVGH: D5.1 EPD_C9.1 J1.21
PREVGL: D3.2 EPD_C11.1 J1.23
RESE: J1.3 Q3.2 R3.1
RESE': R2.2 R3.2 SJ1.2
RESET: C5.1 IC1.1 R_RESET.2 RESET_BUTTON.3 RESET_BUTTON.4 U2.3
RTC_RST: U2.16 U3.4
RX: RX.TP U2.24
SCK: D10.2 J1.13 J4.P5 R6.1 SCK.TP U1.6 U2.6
SCL: J3.4 R2-PINH.1 SENSOR2.4 U2.20 U3.16 U4.7
SDA: J3.3 R1-PINH.1 SENSOR2.3 U2.19 U3.15 U4.8
SRC: C4.2 D5.2 L1.1 Q3.3
SS_SD: D8.2 J4.P2 R10.1 U2.4
TX: TX.TP U2.25
USB_D+: D1.1 U2.14
USB_D-: D1.3 U2.13
VBAT [trasee putere]: C2_BAT.1 MCP73831.3 Q1.3 U4.2 U4.3 VBAT.TP
VBUS [trasee putere]: C1_BAT.1 C4_USB.1 C5_USB.1 CHG_LED.A D1.5 D2.2 MCP73831.4 PFMF.050.1.2 Q1.1 R1_PWRUSB.2 VBUS.TP
VRTC [trasee putere]: C8.1 C10_SUPERCAP.2 R_CAPACITOR.1 U3.14
VUSB [trasee putere]: J2.A4 J2.A9 J2.B4 J2.B9 PFMF.050.1.1

## Tracks (layer width: path | path; a pad name or v marks a point on that pad's centre or on a via)
3V3  (via drill 0.3)
  Top 0.3: 77.28,45.29 76.17,45.29 R1_PINH1.2 | 77.28,45.29 78.94,43.63 R2-PINH1.2 79.01,43.42 79.01,42.73 75.76,39.47 71.95,39.47 55.75,55.68 46.47,55.68 3V3.TP 46.33,55.82 43.49,55.82 41.83,57.48 U1.7 | J3.2 165.3,18.84 165.72,18.84 166.75,19.88 166.75,60.18 166.13,60.8 100.62,60.8 95.91,56.09 D7.2 95.77,56.02 93.14,56.02 87.74,61.42 86.98,61.42 86.15,60.59 86.15,60.11 U3.2 86.08,59.97 86.08,59.69 79.15,52.77 79.15,49.79 77.35,47.99 77.35,45.43 77.28,45.29 | 31.79,34.62 23.06,34.62 R7.2 22.99,34.49 22.99,33.93 v22.92,33.86 | 31.79,34.62 32.62,33.79 R9.2 | 31.79,34.62 31.86,34.76 31.86,36.42 37.05,41.62 R8.2 36.98,41.76 v36.98,45.98 | U2.2 9.49,47.44 9.49,47.09 11.29,45.29 11.29,38.5 R10.2 11.43,38.5 v12.19,38.5 | R1.1 19.88,43 19.88,42.31 21.74,40.44 R5.2 21.81,40.3 21.81,40.1 16.2,34.49 R6.2 16.07,34.56 15.93,34.69 v15.3,34.69 | 57.82,107.41 59.07,107.41 59.83,108.17 R_CHANGE.2 | 57.82,107.41 46.33,107.41 46.12,107.61 46.12,107.68 45.91,107.89 R_BOOT.2 | 58.59,95.29 64.4,95.29 C1_BAT2.1 | 58.59,95.29 57.89,95.29 IC4.5 57.82,95.43 57.82,107.41 | 58.59,95.29 58.59,92.93 58.38,92.73 58.38,86.91 C3.+ 58.17,86.84 56.99,86.84 v56.78,86.63 | 13.37,99.86 11.36,99.86 C9.1 | 13.37,99.86 21.33,107.82 R_RESET.1 | U1.3 33.86,56.23 33.86,56.02 33.1,55.26 33.1,54.71 33.38,54.43 39.61,54.43 40.93,55.75 40.93,56.78 41.62,57.48 U1.7 | U1.7 41.69,57.62 41.69,58.72 U1.8 41.55,58.79 v40.86,58.79 | 31.58,70.15 31.58,68.83 R_CL1.1 | 31.58,70.15 22.71,79.01 22.71,79.29 IC1.2 | 40.23,74.72 40.23,70.01 Q2.3 40.3,69.87 v40.3,69.11 | 40.23,74.72 39.4,75.55 37.05,75.55 31.72,70.22 31.58,70.15
  Top 0.3: J4.P4 4.85,90.72 8.45,90.72 20.64,78.53 22.16,78.53 22.58,78.94 IC1.2 | 13.37,99.86 13.43,99.72 13.43,98.13 17.73,93.83 17.73,84.55 22.58,79.71 22.58,79.43 IC1.2 | v40.37,74.79 40.23,74.72
  Bottom 0.3: v12.19,38.5 12.19,37.81 v15.3,34.69 15.44,34.62 16.2,33.86 v22.92,33.86 | 40.86,60.59 40.86,68.56 v40.3,69.11 | 40.86,60.59 v40.86,58.79 | v56.78,86.63 52.22,86.63 v40.37,74.79 | v36.98,45.98 36.98,54.08 34.14,56.92 34.14,57.34 37.4,60.59 40.86,60.59
32KHZ  (via drill 0.3)
  Top 0.15: U3.1 87.32,60.04 87.32,59.76 80.33,52.77 80.33,43.63 R2-PINH1.1 80.26,43.56 80.26,43.42 75.9,39.06 71.81,39.06 62.26,48.61 v28.95,48.61 | v19.25,48.61 18.35,47.71 18.35,47.51 U2.9
  Bottom 0.15: v28.95,48.61 v19.25,48.61
DN
  Top 0.15: 163.64,53.81 163.84,53.6 164.4,53.6 J2.B7 | 163.64,53.81 163.64,54.29 163.84,54.5 164.4,54.5 J2.A7 | 163.64,53.81 162.74,53.81 158.79,49.86 158.79,47.71 162.94,43.56 162.94,38.16 D1.4
DP
  Top 0.15: J2.A6 164.47,54.08 165.02,54.08 165.23,54.29 165.23,54.78 165.02,54.98 164.47,54.98 J2.B6 164.4,54.98 163.5,54.98 158.51,50 158.51,40.44 162.67,36.29 162.94,36.29 D1.6
EPD_3V3  (via drill 0.3)
  Top 0.3: 46.19,67.93 41.27,67.93 Q2.2 | 46.19,67.93 48.48,70.22 EPD_3V3.TP | 75.07,31.37 75.9,31.37 78.11,33.59 L1.2 78.05,33.73 v77.14,34.62 | 75.07,31.37 74.17,31.37 C7.1 | J1.16 81.58,15.72 81.99,15.72 J1.15 82.06,15.86 82.06,16.2 84.21,18.35 84.21,20.01 EPD_C5.1 84.35,20.15 85.04,20.84 85.04,21.88 81.92,25 81.92,26.87 80.19,28.6 78.74,28.6 77.35,27.21 75.28,27.21 75.07,27.42 75.07,31.37 | v46.26,65.51 46.26,67.8 46.19,67.93
  Bottom 0.3: v77.14,34.62 v46.26,65.51
EPD_3V3_C
  Top 0.3: U2.18 20.91,64.96 20.91,65.3 23.06,67.45 31.51,67.45 R_CL1.2 31.65,67.59 38.99,67.59 39.27,67.86 Q2.1 39.2,68 38.92,68.28 38.92,74.24 EPD_3V3_C.TP
EPD_BUSY  (via drill 0.3)
  Top 0.15: EPD_BUSY.TP 101.66,15.3 98.89,12.53 87.81,12.53 85.04,15.3 85.04,15.65 J1.9 84.97,15.72 84.97,16.14 84.14,16.97 v83.58,16.97 | v17.38,58.03 10.73,64.68 10.73,64.89 U2.26
  Bottom 0.15: v17.38,58.03 22.37,58.03 63.43,16.97 v83.58,16.97
EPD_CS  (via drill 0.3)
  Top 0.15: v23.55,33.73 31.3,33.73 R9.1 | v20.36,30.54 19.6,29.78 D6.2 | v20.91,43.7 20.91,47.44 U2.11 | v83.1,16.48 83.52,16.07 83.52,15.72 J1.12 | v55.82,16.48 44.11,28.18 EPD_CS.TP 44.04,28.25 v43.07,29.22
  Bottom 0.15: v20.36,30.54 v23.55,33.73 | v20.91,43.7 20.91,36.49 23.55,33.86 v23.55,33.73 | v55.82,16.48 v83.1,16.48 | v23.55,33.73 38.57,33.73 v43.07,29.22
EPD_DC  (via drill 0.3)
  Top 0.15: v84.07,14.89 84.07,15.65 J1.11 | v86.7,12.26 104.08,12.26 EPD_DC.TP | v13.3,33.03 13.3,47.44 U2.5
  Bottom 0.15: v86.7,12.26 v84.07,14.89 84,14.89 82.13,13.02 30.95,13.02 30.61,13.37 30.61,15.72 v13.3,33.03
EPD_RST  (via drill 0.3)
  Top 0.15: J1.10 84.55,15.65 84.55,14.75 83.17,13.37 78.53,13.37 65.79,26.11 65.79,33.24 EPD_RST.TP 65.72,33.31 v64.75,34.28 | v38.99,60.04 21.74,60.04 17.11,64.68 17.11,64.89 U2.21
  Bottom 0.15: v64.75,34.28 v38.99,60.04
FLASH_CS  (via drill 0.3)
  Top 0.15: v32.13,58.72 33.86,58.72 U1.1 | v27.21,53.81 22.16,48.75 U2.12 22.16,47.23 23.13,46.26 23.13,40.37 R5.1 23.13,40.3 23.13,40.1 22.44,39.4 22.44,33.73 23.41,32.76 23.41,23.61 D9.2
  Bottom 0.15: v27.21,53.81 v32.13,58.72
GDR
  Top 0.15: 91.62,19.11 88.57,16.07 88.57,15.72 J1.2 | 91.62,19.11 93.42,19.11 R4.1 | Q3.1 91.06,23.34 91.06,19.74 91.62,19.18 91.62,19.11
GND  (via drill 0.3)
  Top 0.15: 1.18,92.93 1.18,94.8 2.15,95.77 J4.G4 | 1.18,92.93 1.18,82.68 J4.G3 | J4.G1 15.37,85.66 15.37,86.7 14.54,87.53 14.54,90.51 15.37,91.34 J4.G2 15.37,91.41 13.85,92.93 4.85,92.93 J4.P6 4.78,92.93 v3.67,92.93 | v2.7,92.93 1.18,92.93 | IC1.3 23.68,79.29 26.52,79.29 GND1.TP 26.59,79.36 26.59,94.8 28.39,96.6 C_DELAY.2 28.46,96.67 28.46,96.88 29.09,97.5 29.09,98.54 | 29.09,98.54 29.09,106.71 27.7,108.1 C5.2 27.63,108.17 27.56,108.24 26.18,108.24 RESET_BUTTON.2 26.11,108.31 22.64,108.31 RESET_BUTTON.1 22.58,108.31 22.44,108.44 20.77,108.44 13.5,101.17 11.36,101.17 C9.2 11.29,101.11 v10.6,100.41 | 29.09,98.54 27.91,98.54 21.74,92.38 19.04,92.38 GND2.TP | 34.62,54.98 35.87,54.98 37.74,56.85 U1.9 | 34.62,54.98 33.93,54.98 U1.4 | U2.29_5 13.85,54.64 12.74,54.64 U2.29_2 12.67,54.64 12.67,53.46 U2.29_1 12.74,53.46 13.85,53.46 U2.29_4 15.1,53.46 U2.29_7 15.17,54.64 U2.29_8 15.17,55.88 U2.29_9 | U2.29_9 15.1,55.95 U2.29_6 13.85,55.95 12.67,55.95 U2.29_3 12.67,56.02 8.24,60.45 8.24,64.89 U2.28 8.17,65.03 7.96,65.23 v7.96,66.06 | 34.62,56.51 34.62,54.98 | 34.62,56.51 34.07,57.06 16.34,57.06 15.23,55.95 U2.29_9 | SENSOR2.5 65.44,54.85 65.44,54.57 64.96,54.08 64.4,54.08 63.92,54.57 63.92,54.85 SENSOR2.7 63.85,54.91 63.85,55.12 63.09,55.88 63.09,57.76 SENSOR2.1 63.09,57.82 63.09,59.55 | U4.9 69.67,73.2 69.67,73.06 69.11,72.5 68.7,72.5 U4.4 68.63,72.44 63.09,66.89 63.09,59.55 | U4.9 69.67,72.99 70.64,72.99 U4.6 70.7,72.92 71.05,72.92 72.99,70.98 72.99,64.33 C2.2 | U4.9 69.67,73.27 69.67,73.41 69.11,73.96 68.7,73.96 U4.1 68.63,74.03 68.63,76.17 59.35,85.45 59.35,85.52
  Top 0.15: C1.2 84.35,66.41 79.08,66.41 71.12,74.37 70.15,74.37 69.46,73.68 U4.9 | 52.84,89.33 51.11,89.33 50.97,89.19 50.97,88.29 51.59,87.67 51.59,87.46 R1_PWRUSB.1 | 52.84,89.33 55.26,86.91 C3.- 55.33,86.84 55.95,86.84 57.27,85.52 59.35,85.52 | 52.84,89.33 52.84,89.4 55.75,92.31 55.75,93.76 55.19,94.32 IC4.2 55.26,94.32 55.75,94.8 55.75,95.63 55.54,95.84 54.57,95.84 53.95,95.22 49.1,95.22 C1_BAT1.2 | BOOT_BUTTON.1 47.16,108.31 50.62,108.31 BOOT_BUTTON.2 50.69,108.24 50.76,108.17 52.15,108.17 C6.2 52.22,108.17 58.72,108.17 59.28,108.72 60.52,108.72 61.08,108.17 CHANGE_BUTTON.1 61.15,108.17 64.61,108.17 CHANGE_BUTTON.2 | CHANGE_BUTTON.2 64.68,108.1 65.09,107.68 65.09,94.8 64.47,94.18 64.47,93.97 C1_BAT2.2 64.4,93.9 64.4,90.58 59.35,85.52 | C10.2 66.13,107.96 65.44,107.96 65.16,107.68 CHANGE_BUTTON.2 | 63.09,59.55 34.97,59.55 34.62,59.21 34.62,58.93 35.18,58.38 35.18,56.99 34.69,56.51 34.62,56.51 | 83.86,45.43 85.94,45.43 89.82,49.31 90.72,49.31 C8.2 90.79,49.31 91,49.31 91.69,48.61 104.29,48.61 110.11,54.43 C4_USB.2 | 83.86,45.43 82.96,46.33 C10_SUPERCAP.1 82.96,46.4 83.52,46.95 83.52,50.76 U3.13 | C4_USB.2 110.18,54.43 110.39,54.43 118,46.81 126.52,46.81 R2_BAT.1 126.66,46.81 130.81,46.81 132.41,45.22 135.25,45.22 MCP73831.2 135.31,45.22 141.06,45.22 C2_BAT.2 141.13,45.29 142.45,46.6 142.45,48.34 145.98,51.87 145.98,52.98 C5_USB.2 | J3.1 165.3,17.87 165.58,17.87 167.65,19.94 167.65,47.92 168.9,49.17 J2.MP1 168.9,49.24 168.9,54.29 | 168.9,54.29 168.9,59.35 J2.MP2 | J2.B12 164.4,51.24 164.4,50.97 J2.A1 164.47,50.9 164.47,50.76
  Top 0.15: 163.98,48.2 159.55,48.2 R2-USB1.1 | 163.98,48.2 164.95,49.17 J2.MP3 164.95,49.24 164.47,49.72 164.47,50.76 | 163.98,48.2 163.98,38.43 165.23,37.19 165.51,37.19 D1.2 | J2.B1 164.4,57.41 164.4,57.62 J2.A12 164.47,57.69 164.47,57.82 | 164.47,57.82 164.47,58.86 164.95,59.35 J2.MP4 164.4,58.86 160.66,58.86 159.97,59.55 R2-USB.2 159.9,59.55 138.43,59.55 135.52,56.65 135.31,56.65 C1_BAT.2 135.25,56.58 111.77,56.58 110.39,55.19 110.39,54.5 C4_USB.2 | 164.47,50.76 165.72,50.76 166.13,51.18 166.13,54.29 | 166.13,54.29 166.13,57.41 165.72,57.82 164.47,57.82 | v167.31,54.29 168.9,54.29 | v166.2,54.29 166.13,54.29 | EPD_C1.2 88.02,21.12 87.12,21.12 87.05,21.19 EPD_C2.2 | D4.1 82.34,27.91 82.34,25.9 86.98,21.26 EPD_C2.2 | EPD_C12.2 77.08,21.47 77.14,21.4 78.05,21.4 EPD_C11.2 78.11,21.4 78.81,21.4 79.08,21.68 EPD_C10.2 79.15,21.68 80.12,21.68 EPD_C9.2 80.19,21.61 81.16,21.61 EPD_C8.2 81.16,21.47 82.2,21.47 EPD_C7.2 82.27,21.47 82.55,21.74 83.17,21.74 EPD_C6.2 83.24,21.74 83.58,21.4 84.21,21.4 EPD_C5.2 84.07,21.47 v84.07,22.09 | v77.28,13.99 77.28,13.92 76.59,13.23 J1.MP2 | v80.61,14.89 81.02,15.3 81.02,15.65 J1.17 | R2.1 104.22,27.21 99.31,27.21 99.23,27.15 SJ1.1 99.17,27.08 99.17,23.55 94.8,19.18 R4.2 94.73,19.11 94.73,18 90.03,13.3 J1.MP1 90.03,13.23 87.6,13.23 85.97,14.85 | 85.97,14.85 85.59,15.23 85.59,15.65 J1.8 85.59,15.72 85.59,19.6 86.98,20.98 86.98,21.12 EPD_C2.2 | v86.08,14.89 86.01,14.89 85.97,14.85 | 19.6,26.18 19.6,28.25 D6.1 | 19.6,26.18 22.92,22.85 24.24,22.85 24.93,23.55 D9.1 25,23.61 25,26.59 28.25,29.85 D11.1 28.39,29.92 28.53,29.92 31.65,33.03 39.2,33.03 44.74,38.57 D12.1 44.8,38.57 68.77,38.57 72.85,34.49 72.85,31.37 C7.2 72.92,31.3 v73.75,30.47
  Top 0.15: v18.49,25.48 15.65,25.48 D10.1 15.58,25.48 14.61,25.48 11.22,28.88 D8.1 11.15,28.95 8.24,31.86 8.24,47.44 U2.1 8.17,47.51 7.96,47.71 v7.96,48.61 | v19.53,26.18 19.6,26.18 | v83.86,40.65 83.86,45.43
  Bottom 0.15: v3.67,92.93 v2.7,92.93 | v3.67,92.93 3.67,93.49 v10.6,100.41 | v3.67,92.93 3.67,70.36 v7.96,66.06 v7.96,48.61 | v166.2,54.29 v167.31,54.29 | v77.28,13.99 79.71,13.99 v80.61,14.89 83.45,14.89 83.93,15.37 84.07,15.37 | 84.07,15.37 85.59,15.37 v86.08,14.89 | 84.07,15.37 v84.07,22.09 82.13,22.09 v73.75,30.47 73.75,30.54 v83.86,40.65 | v18.49,25.48 18.84,25.48 v19.53,26.18
  pour Top: -12.92,-28.92 178.42,-28.92 178.42,120.92 -12.92,120.92
  pour Bottom: -10.92,-34.42 183.92,-34.42 183.92,117.42 -11.42,117.42 -10.92,-33.98 -10.92,-33.98 -10.92,-34 -10.92,-34.01 -10.92,-34.02
GPIO8
  Top 0.15: R1.2 19.8,44.32 19.8,47.3 19.67,47.44 U2.10
I2C_PW  (via drill 0.3)
  Top 0.15: 66.58,54.81 65.79,55.61 65.16,55.61 | 66.58,54.81 69.32,52.08 69.32,51.52 R1-PINH.2 69.39,51.45 70.01,50.83 72.09,50.83 80.26,59 80.26,60.94 84.35,65.03 C1.1 | 65.16,55.61 64.68,55.12 64.68,54.91 SENSOR2.6 | 66.58,54.81 65.58,53.81 63.85,53.81 63.09,54.57 63.09,54.85 SENSOR2.8 | 63.64,63.5 63.64,58.03 63.85,57.82 SENSOR2.2 63.92,57.76 63.92,57.48 65.16,56.23 65.16,55.61 | 63.64,63.5 63.64,65.23 64.96,66.55 64.96,66.76 R2-PINH.2 65.03,66.55 67.93,63.64 73.47,63.64 74.1,64.26 74.31,64.26 C2.1 | U2.17 22.16,64.68 23.34,63.5 v62.26,63.5 | v63.57,63.5 63.64,63.5
  Bottom 0.15: v63.57,63.5 v62.26,63.5
INT_RTC  (via drill 0.3)
  Top 0.15: R1_PINH1.1 74.93,45.29 74.93,41 75.14,40.79 INT_RTC.TP | v32.62,56.58 25.97,56.58 17.11,47.71 17.11,47.51 U2.8 | v35.11,59.07 35.8,59.07 36.01,59.28 57.62,59.28 71.53,45.36 74.86,45.36 R1_PINH1.1 | U3.3 84.76,60.04 84.76,58.93 74.86,49.03 74.86,45.43 R1_PINH1.1
  Bottom 0.15: v35.11,59.07 v32.62,56.58
IO/BOOT
  Top 0.15: C6.1 52.15,109.48 50.97,109.48 50.69,109.76 BOOT_BUTTON.3 47.16,109.76 BOOT_BUTTON.4 47.09,109.76 46.6,109.28 45.91,109.28 R_BOOT.1 45.84,109.21 45.15,108.52 45.15,73.34 40.58,68.77 40.58,67.93 37.6,64.96 24.72,64.96 U2.15
IO/CHANGE  (via drill 0.3)
  Top 0.15: C10.1 66.13,109.35 64.96,109.35 64.68,109.62 CHANGE_BUTTON.3 64.61,109.62 61.15,109.62 CHANGE_BUTTON.4 61.08,109.62 60.94,109.48 59.9,109.48 R_CHANGE.1 59.83,109.42 v58.72,109.42 | v25.14,75.83 14.54,65.23 U2.23
  Bottom 0.15: v58.72,109.42 v25.14,75.83
MISO  (via drill 0.3)
  Top 0.15: R8.1 37.12,40.3 41.62,40.3 43.28,38.64 D12.2 43.28,38.57 v43.28,37.74 | v45.15,35.87 48.41,35.87 MISO.TP | v6.03,93.42 5.4,94.04 5.05,94.04 J4.P7 | v8.59,66.06 9.42,65.23 9.42,64.96 U2.27 9.49,64.89 9.49,64.68 16.62,57.55 33.86,57.55 U1.2 33.93,57.48 34.07,57.48 34.42,57.13 v34.69,57.13
  Bottom 0.15: v45.15,35.87 v43.28,37.74 43.28,48.54 v34.69,57.13 | v6.03,93.42 6.03,68.63 v8.59,66.06
MOSI  (via drill 0.3)
  Top 0.15: v77.97,14.54 78.11,14.4 81.65,14.4 82.48,15.23 82.48,15.65 J1.14 | v47.09,14.54 35.87,25.76 MOSI.TP 35.8,25.83 31.79,29.85 29.85,29.85 D11.2 29.85,29.78 29.85,27.21 25.21,22.58 22.51,22.58 18.91,26.18 18.91,31.86 21.68,34.62 R7.1 21.74,34.69 21.74,39.13 22.44,39.82 22.44,41.55 | 22.44,41.55 20.22,43.77 19.25,43.77 15.86,47.16 15.86,47.44 U2.7 | v30.05,49.1 35.25,49.1 41.06,54.91 41.62,54.91 U1.5 | v22.51,41.55 22.44,41.55 | v16.9,78.46 5.75,89.61 5.05,89.61 J4.P3
  Bottom 0.15: v47.09,14.54 v77.97,14.54 | v22.51,41.55 29.6,48.65 | 29.6,48.65 v30.05,49.1 | v16.9,78.46 16.9,57.89 25.69,49.1 29.15,49.1 29.6,48.65
N$1
  Top 0.15: R2-USB1.2 159.55,49.44 160.24,49.44 163.84,53.05 164.4,53.05 J2.A5
N$2
  Top 0.15: R2-USB.1 159.9,58.24 154.77,58.24 152.07,55.54 152.07,53.88 152.21,53.74 161.56,53.74 163.84,56.02 164.4,56.02 J2.B5
N$3
  Top 0.15: 54.36,93.97 54.57,93.76 54.64,93.76 54.98,93.42 IC4.3 | 54.36,93.97 54.36,94.73 54.85,95.22 54.98,95.22 IC4.1 | Q1.2 46.4,81.72 46.4,82.48 48.68,84.76 48.68,88.78 D2.1 48.75,88.85 49.03,89.12 49.03,93.83 C1_BAT1.1 49.1,93.9 49.17,93.97 54.36,93.97
N$4
  Top 0.15: C4.1 92.31,27.84 91.34,27.84 90.86,28.32 86.15,28.32 85.8,27.98 D4.2 85.73,27.98 84.69,29.02 78.6,29.02 77.56,27.98 75.97,27.98 D3.1
N$5
  Top 0.15: CHG_LED.C 143.35,48.06 143.35,43.14 R1_BAT.2
N$6
  Top 0.15: R1_BAT.1 142.03,43.14 136.35,43.14 135.31,44.18 MCP73831.1
N$7
  Top 0.15: J1.18 80.54,15.72 80.54,17.31 83.17,19.94 83.17,20.5 EPD_C6.1
N$8
  Top 0.15: R2_BAT.2 126.66,45.5 131.44,45.5 132.68,44.25 MCP73831.5
N$9
  Top 0.15: J1.4 87.53,15.72 87.53,19.25 88.02,19.74 EPD_C1.1
N$10
  Top 0.15: J1.5 87.05,15.72 87.05,19.88 EPD_C2.1
N$11
  Top 0.15: J1.19 80.05,15.72 80.05,17.94 82.2,20.08 EPD_C7.1
N$12
  Top 0.15: J1.20 79.57,15.72 79.57,18.63 81.16,20.22 EPD_C8.1
N$13
  Top 0.15: R_CAPACITOR.2 91.48,53.39 95.29,53.39 95.77,53.88 D7.1
N$14
  Top 0.15: J1.22 78.6,15.72 78.6,19.46 79.08,19.94 79.08,20.36 EPD_C10.1
N$15
  Top 0.15: IC1.5 21.74,82.13 21.74,91.27 28.39,97.92 C_DELAY.1
N$16
  Top 0.15: J1.24 77.49,15.72 77.49,19.53 77.08,19.94 77.08,20.15 EPD_C12.1
PREVGH
  Top 0.15: EPD_C9.1 80.12,20.29 79.08,19.25 79.08,15.72 J1.21 79.01,15.65 79.01,15.3 78.74,15.03 77.28,15.03 70.15,22.16 70.15,35.87 D5.1
PREVGL
  Top 0.15: J1.23 78.05,15.72 78.05,20.01 EPD_C11.1 78.05,20.08 78.05,20.36 77.63,20.77 76.73,20.77 76.38,21.12 76.38,21.95 79.43,25 79.43,27.91 D3.2
RESE
  Top 0.15: J1.3 88.09,15.72 88.09,18.77 90.3,20.98 90.3,23.96 91,24.65 Q3.2 91,24.72 90.37,25.35 90.37,27.7 R3.1
RESE'
  Top 0.15: R2.2 104.22,28.6 99.23,28.6 SJ1.2 99.17,28.67 98.82,29.02 90.37,29.02 R3.2
RESET
  Top 0.15: C5.1 27.63,109.42 26.52,109.42 26.18,109.76 RESET_BUTTON.3 26.11,109.76 22.64,109.76 RESET_BUTTON.4 22.58,109.76 21.95,109.76 21.4,109.21 R_RESET.2 21.33,109.14 18.21,109.14 10.11,101.04 10.11,97.71 | 10.11,97.71 14.75,93.07 15.51,93.07 16.2,92.38 16.2,85.52 21.68,80.05 21.68,79.36 IC1.1 | 10.11,97.71 6.16,97.71 3.19,94.73 3.19,87.88 6.79,84.28 6.79,54.02 10.66,50.14 10.66,47.51 U2.3
RTC_RST  (via drill 0.3)
  Top 0.15: v62.6,63.99 24.17,63.99 23.48,64.68 23.48,64.89 U2.16 | v82.48,61.49 83.52,60.45 83.52,60.11 U3.4
  Bottom 0.15: v62.6,63.99 79.98,63.99 v82.48,61.49
RX
  Top 0.15: U2.24 13.3,64.96 13.3,71.47 13.02,71.74 RX.TP
SCK  (via drill 0.3)
  Top 0.15: v81.58,13.85 82.96,15.23 82.96,15.65 J1.13 | v31.09,13.5 29.29,15.3 SCK.TP 29.22,15.37 17.66,26.94 15.65,26.94 D10.2 15.58,27.01 14.82,27.77 14.82,34.83 15.65,35.66 | 15.65,35.66 16.14,35.66 R6.1 | v23.61,49.58 35.32,49.58 41.62,55.88 41.62,56.23 U1.6 | v16.41,49.58 14.54,47.71 14.54,47.51 U2.6 14.61,47.44 14.61,47.16 15.65,46.12 15.65,35.66 | v6.51,91.27 5.96,91.83 5.05,91.83 J4.P5
  Bottom 0.15: v81.58,13.85 79.98,13.85 79.64,13.5 v31.09,13.5 | v23.61,49.58 v16.41,49.58 16.41,58.86 6.51,68.77 v6.51,91.27
SCL  (via drill 0.3)
  Top 0.15: 67.1,63.36 74.51,63.36 74.93,63.78 74.93,69.53 70.98,73.47 70.7,73.47 U4.7 | 67.1,63.36 65.03,65.44 R2-PINH.1 | 65.51,61.7 65.51,57.82 SENSOR2.4 | 65.51,61.7 67.1,63.29 67.1,63.36 | v62.6,63.02 20.01,63.02 18.35,64.68 18.35,64.89 U2.20 | v64.13,63.02 65.44,61.7 65.51,61.7 | v117.31,20.84 165.23,20.84 J3.4 | v88.02,50.14 87.39,50.76 U3.16
  Bottom 0.15: v62.6,63.02 v64.13,63.02 75.07,63.02 87.95,50.14 v88.02,50.14 v117.31,20.84
SDA  (via drill 0.3)
  Top 0.15: U4.8 70.7,73.96 70.98,73.96 75.21,69.73 75.21,56.02 70.7,51.52 R1-PINH.1 70.64,51.52 64.68,57.48 64.68,57.76 SENSOR2.3 64.61,57.82 64.61,58.17 v64.13,58.66 | v24.03,69.6 19.67,65.23 19.67,64.96 U2.19 | v116.75,19.8 165.23,19.8 J3.3 | v87.19,49.38 86.15,50.41 86.15,50.76 U3.15
  Bottom 0.15: v24.03,69.6 53.18,69.6 v64.13,58.66 77.84,58.66 87.12,49.38 v87.19,49.38 v116.75,19.8
SRC  (via drill 0.3)
  Top 0.15: v91.41,26.45 92.31,26.45 C4.2 | v89.61,24.65 88.99,24.03 Q3.3 | D5.2 73.68,35.94 77.01,35.94 77.63,36.56 79.78,36.56 82.68,33.66 L1.1 84.07,33.64 v84.1,33.67
  Bottom 0.15: v89.61,24.65 91.36,26.41 | 91.36,26.41 v91.41,26.45 | v84.1,33.67 91.36,26.41
SS_SD
  Top 0.15: D8.2 12.67,28.95 11.36,30.26 11.36,37.12 R10.1 11.43,37.12 12.67,38.36 12.67,38.64 12.05,39.27 12.05,47.44 U2.4 11.98,47.51 11.98,49.24 7.48,53.74 7.48,86.42 5.4,88.5 J4.P2
TX
  Top 0.15: U2.25 12.05,64.96 12.05,67.73 TX.TP
USB_D+
  Top 0.15: D1.1 164.88,36.22 163.84,35.18 85.04,35.18 81.44,38.78 69.39,38.78 60.73,47.44 24.72,47.44 U2.14
USB_D-
  Top 0.15: D1.3 165.58,38.09 165.78,38.09 166.34,37.53 166.34,35.8 165.44,34.9 84.9,34.9 81.3,38.5 69.25,38.5 61.29,46.47 24.17,46.47 23.48,47.16 23.48,47.44 U2.13
VBAT  (via drill 0.3)
  Top 0.3: C2_BAT.1 141.06,46.54 135.66,46.54 135.31,46.19 MCP73831.3 135.18,46.26 v133.72,46.26 | U4.3 U4.2 68.56,73.54 67.93,73.54 | Q1.3 48.48,82.61 51.04,82.61 51.38,82.27 VBAT.TP 51.52,82.2 60.18,73.54 67.93,73.54 | v67.93,73.41 67.93,73.54
  Bottom 0.3: v133.72,46.26 98.47,46.26 71.33,73.41 v67.93,73.41
VBUS  (via drill 0.3)
  Top 0.3: D1.5 163.01,37.12 163.43,37.12 163.91,36.63 163.91,35.8 163.71,35.59 162.32,35.59 154.15,43.77 154.15,50.21 PFMF.050.1.2 154.01,50.28 150.06,50.28 146.12,54.22 C5_USB.1 145.98,54.29 142.45,50.76 | 46.4,87.25 46.4,88.57 46.6,88.78 D2.2 | 46.4,87.25 46.4,83.65 Q1.1 46.33,83.45 45.64,82.75 45.64,81.16 45.84,80.95 46.88,80.95 47.16,81.23 47.16,82.61 47.92,83.38 48.82,83.38 52.42,86.98 52.42,87.95 51.66,88.71 R1_PWRUSB.2 | v44.67,87.25 41.55,87.25 VBUS.TP | v46.26,87.25 46.4,87.25 | 142.45,50.76 141.82,50.14 141.82,48.13 CHG_LED.A 141.69,47.99 134.55,47.99 132.82,46.26 MCP73831.4 132.68,46.19 124.44,54.43 111.49,54.43 C4_USB.1 111.42,54.64 111.15,54.91 v111.15,55.33 | 142.45,50.76 136.63,56.58 C1_BAT.1
  Bottom 0.3: v44.67,87.25 v46.26,87.25 46.4,87.19 71.61,87.19 103.46,55.33 v111.15,55.33
VRTC
  Top 0.3: 90.16,52.15 90.16,51.24 92.03,49.38 C8.1 | 90.16,52.15 90.16,53.32 R_CAPACITOR.1 | C10_SUPERCAP.2 85.11,46.4 85.11,50.48 84.83,50.76 U3.14 84.9,50.9 84.9,51.31 85.73,52.15 90.16,52.15
VUSB
  Top 0.3: J2.A4 164.4,51.8 164.4,52.01 J2.B9 164.54,52.08 165.09,52.08 165.65,52.63 165.65,55.95 165.09,56.51 164.54,56.51 J2.B4 | J2.B4 164.4,56.58 164.4,56.78 J2.A9 | J2.B4 164.26,56.51 155.88,56.51 154.15,54.78 PFMF.050.1.1